# EAGLE board Temperature Beeper (EAGLE 9.5.2)
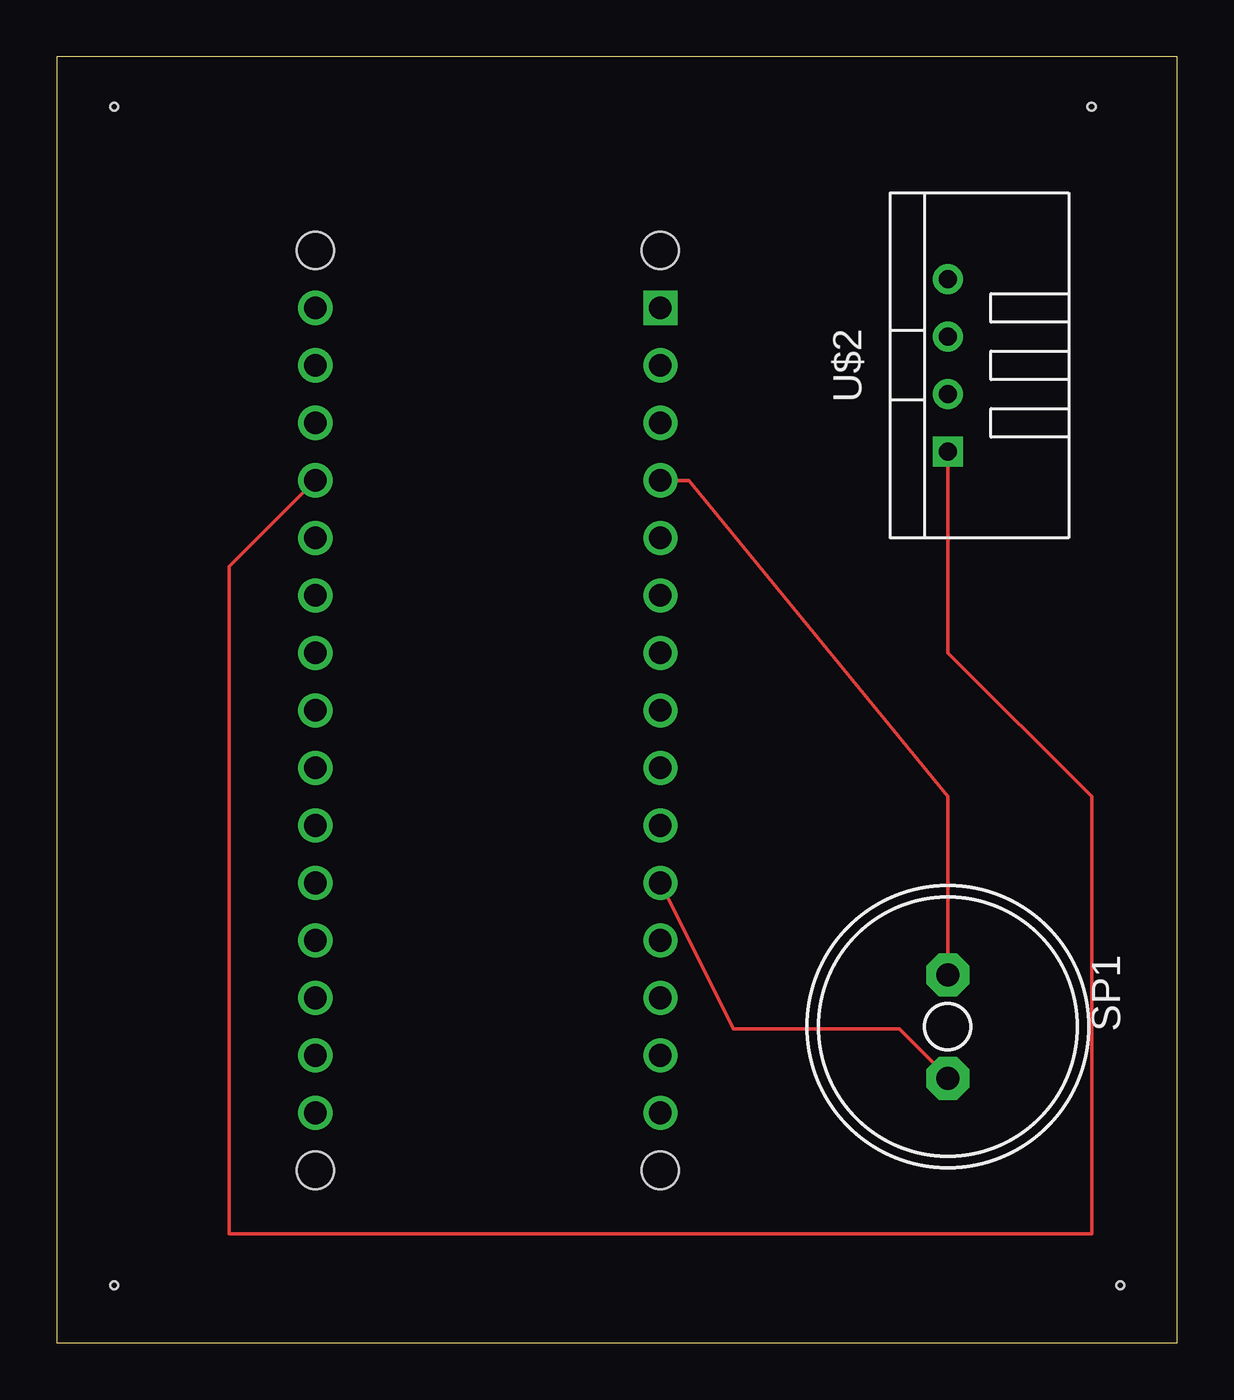
[diagram p0: board, top side]
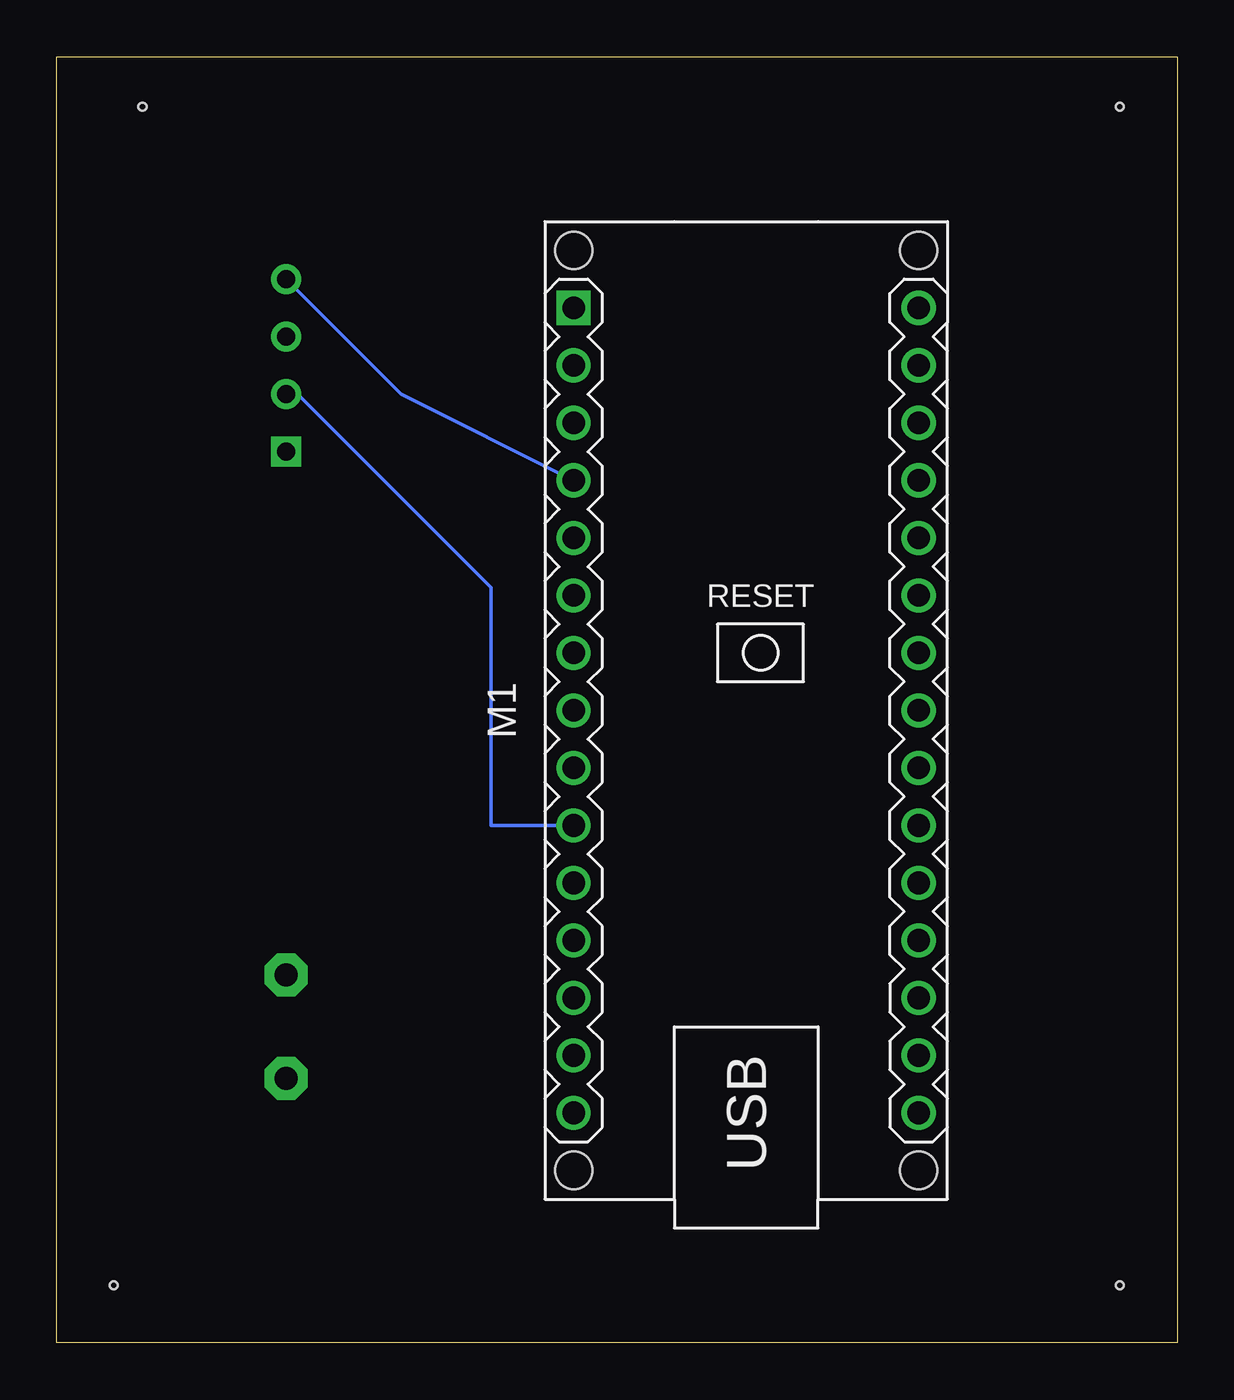
[diagram p1: board, bottom side, seen from below]

Size 49.51 x 56.82 mm. Coordinates in mm from the lower left corner, seen from the top.
Outline: 0,0 49.51,0 49.51,56.82 0,56.82 0,0
Copper layers (1*16): Top 0.035mm / dielectric 1.5mm / Bottom 0.035mm
Design rules "default": minimum track width 6mil, minimum drill 0.35mm, track to track 6mil, track to pad 6mil, pad to pad 6mil, via to via 6mil, smd to smd 6mil, copper to edge 40mil, drill to drill 6mil, minimum pad ring 10mil, minimum via ring 8mil, stop-mask expansion 4mil, vias tented up to drill 0mil, thermal gap 10mil
Holes 0.35 mm at 2.54,54.61 45.72,54.61 2.54,2.54 46.99,2.54

## Footprints (pad centres in the part's own frame; a part is rotated, then mirrored left to right if it is on the bottom)
ARDUINO-NANO-3.0 = drill 1 square: J1.1 17.78,7.62 | drill 1: J1.2 15.24,7.62; J1.3 12.7,7.62; J1.4 10.16,7.62; J1.5 7.62,7.62; J1.6 5.08,7.62; J1.7 2.54,7.62; J1.8 0,7.62; J1.9 -2.54,7.62; J1.10 -5.08,7.62; J1.11 -7.62,7.62; J1.12 -10.16,7.62; J1.13 -12.7,7.62; J1.14 -15.24,7.62; J1.15 -17.78,7.62; J2.1 17.78,-7.62; J2.2 15.24,-7.62; J2.3 12.7,-7.62; J2.4 10.16,-7.62; J2.5 7.62,-7.62; J2.6 5.08,-7.62; J2.7 2.54,-7.62; J2.8 0,-7.62; J2.9 -2.54,-7.62; J2.10 -5.08,-7.62; J2.11 -7.62,-7.62; J2.12 -10.16,-7.62; J2.13 -12.7,-7.62; J2.14 -15.24,-7.62; J2.15 -17.78,-7.62 | hole 1.651: -20.32,7.62; -20.32,-7.62; 20.32,-7.62; 20.32,7.62
AL11P = drill 1.016 pad 1.905 octagon: + 2.286,0; - -2.286,0
TEMP-HUM-SENSOR-DHT22 = drill 0.8 square: 1 -3.81,0 | drill 0.8: 2 -1.27,0; 3 1.27,0; 4 3.81,0

## Placement (x,y rotation side)
M1  ARDUINO-NANO-3.0  [ARDUINO-NANO-3.0]  19.05,27.94 90 bottom
SP1  AL11P  [AL11P]  39.37,13.97 270 top
U$2  TEMP-HUM-SENSOR-DHT22  [TEMP-HUM-SENSOR-DHT22]  39.37,43.18 90 top

## Library data of the parts
M1 = diy-modules
SP1 = buzzer; OC_FARNELL: unknown; OC_NEWARK: unknown
U$2 = diy-modules2

## Nets
3V3: M1.J2.14
GND.2: M1.J2.2
N$1: M1.J1.11 SP1.+
N$2: M1.J1.4 SP1.- U$2.4
N$3: M1.J2.4 U$2.1
N$5: M1.J1.10 U$2.2
VIN: M1.J2.1

## Tracks (layer width: path | path; a pad name or v marks a point on that pad's centre or on a via)
N$1
  Top 0.152: M1.J1.11 29.9,13.87 37.24,13.87 39.37,11.73 SP1.+
N$2
  Top 0.152: SP1.- 39.37,24.13 27.94,38.1 M1.J1.4
  Bottom 0.152: U$2.4 34.29,41.91 M1.J1.4
N$3
  Top 0.152: U$2.1 39.37,30.48 45.72,24.13 45.72,4.83 7.62,4.83 7.62,34.29 M1.J2.4
N$5
  Bottom 0.152: U$2.2 38.86,41.91 30.33,33.38 30.33,22.86 M1.J1.10